# Altium PCB usbasp.PcbDoc
Units mm, origin at the board's own origin, x right, y up, seen from the top; angles counter-clockwise.
Board outline 44.2 x 21.34 mm, 2 copper layers (Top Layer, Bottom Layer); 21 components, 19 nets, 85 pads, 32 vias.
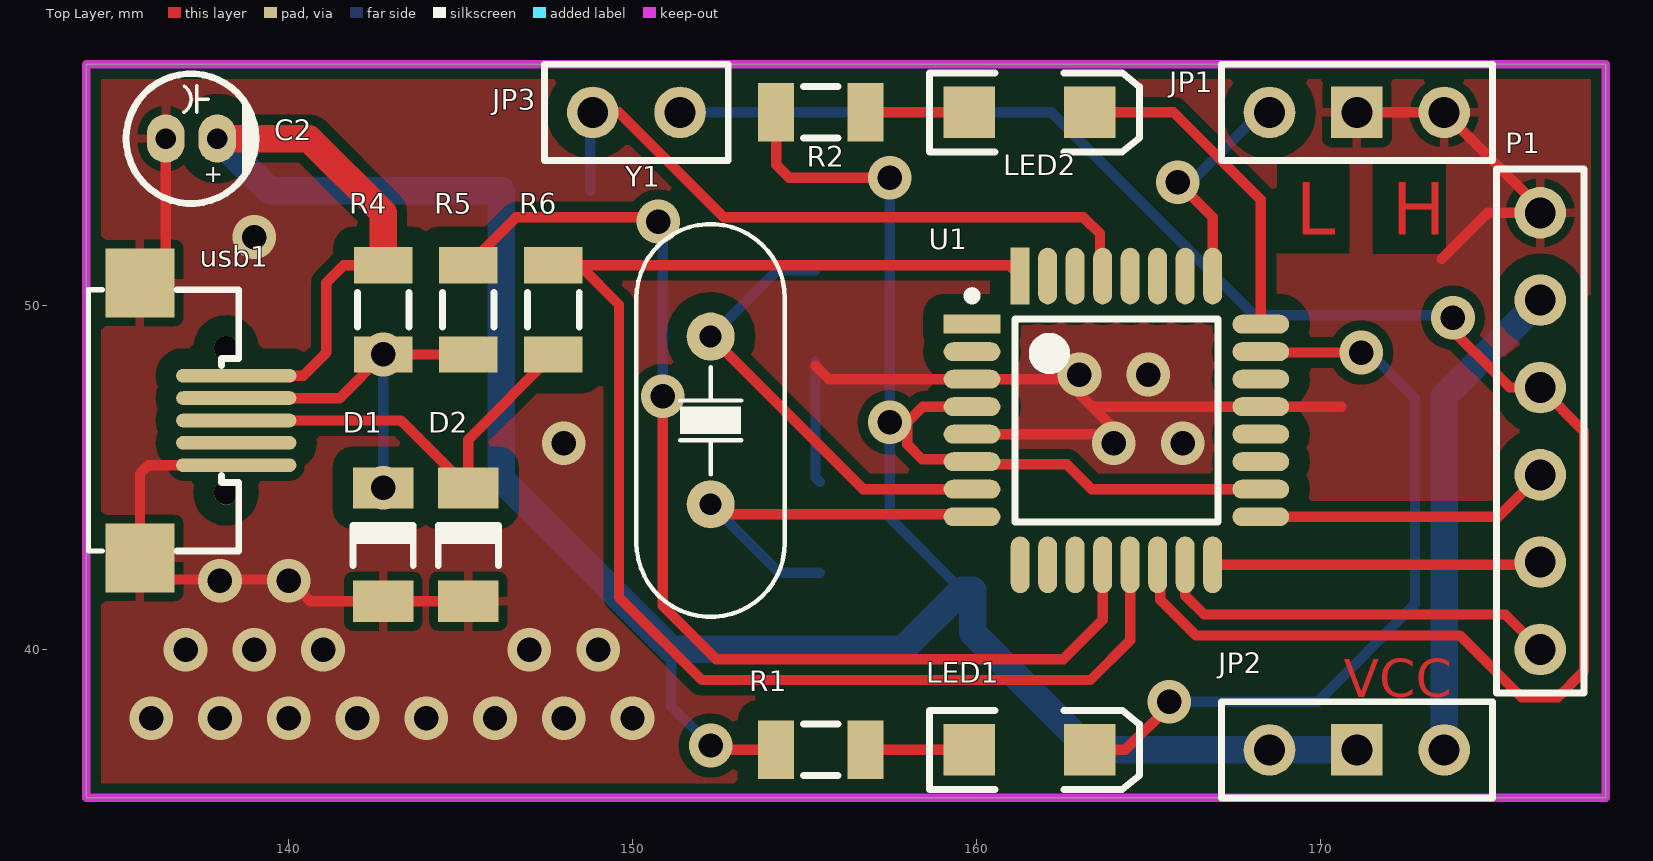
[diagram p0: Top Layer view]
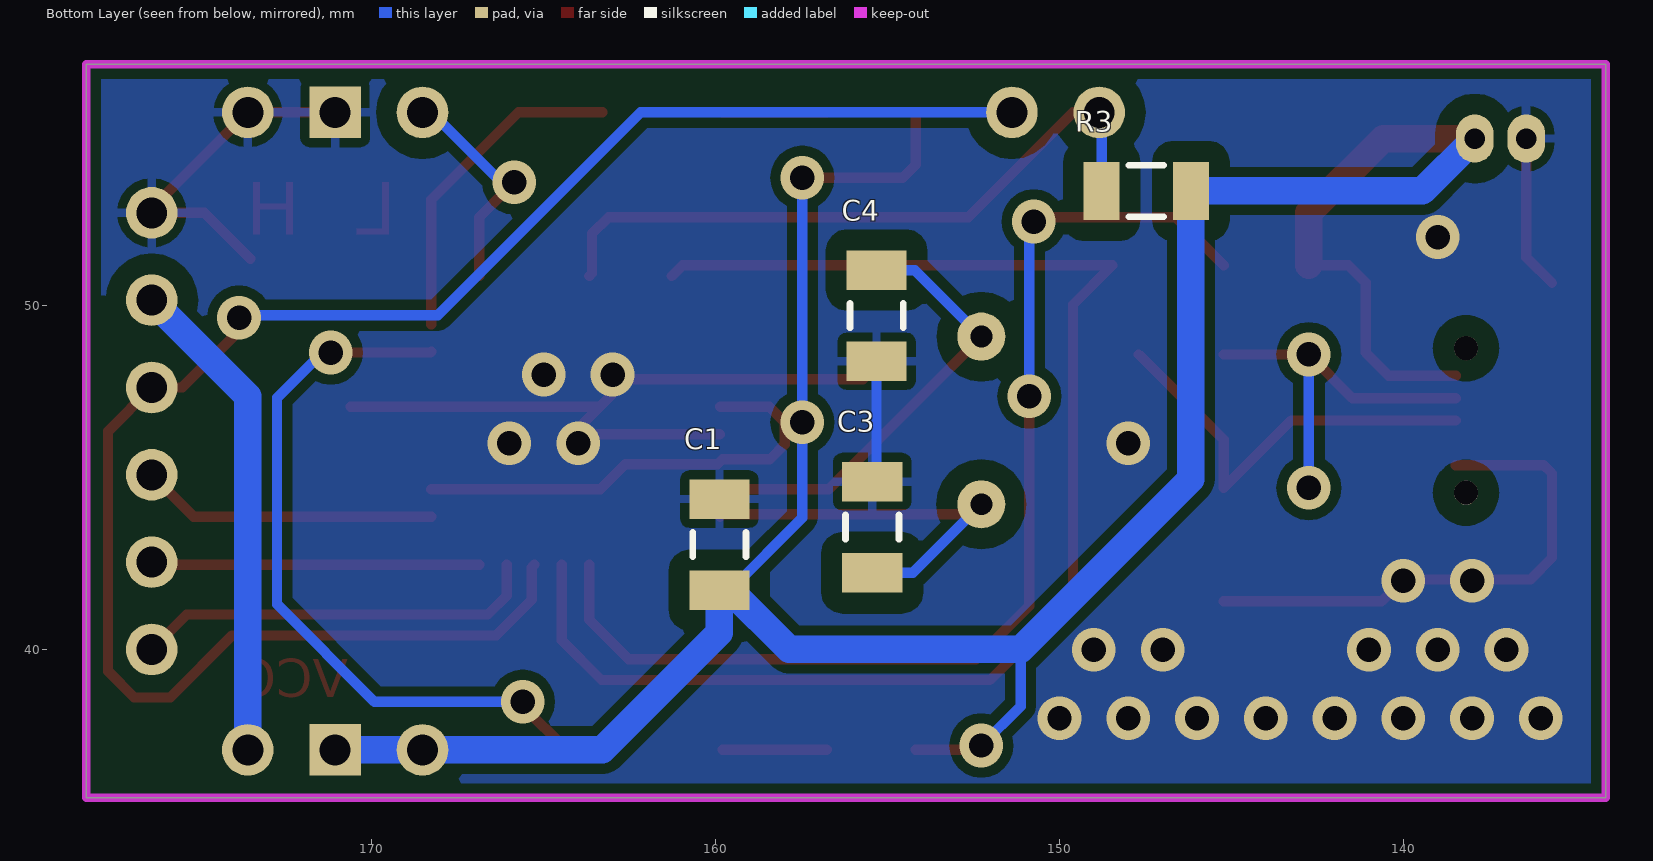
[diagram p1: Bottom Layer view, seen from below]
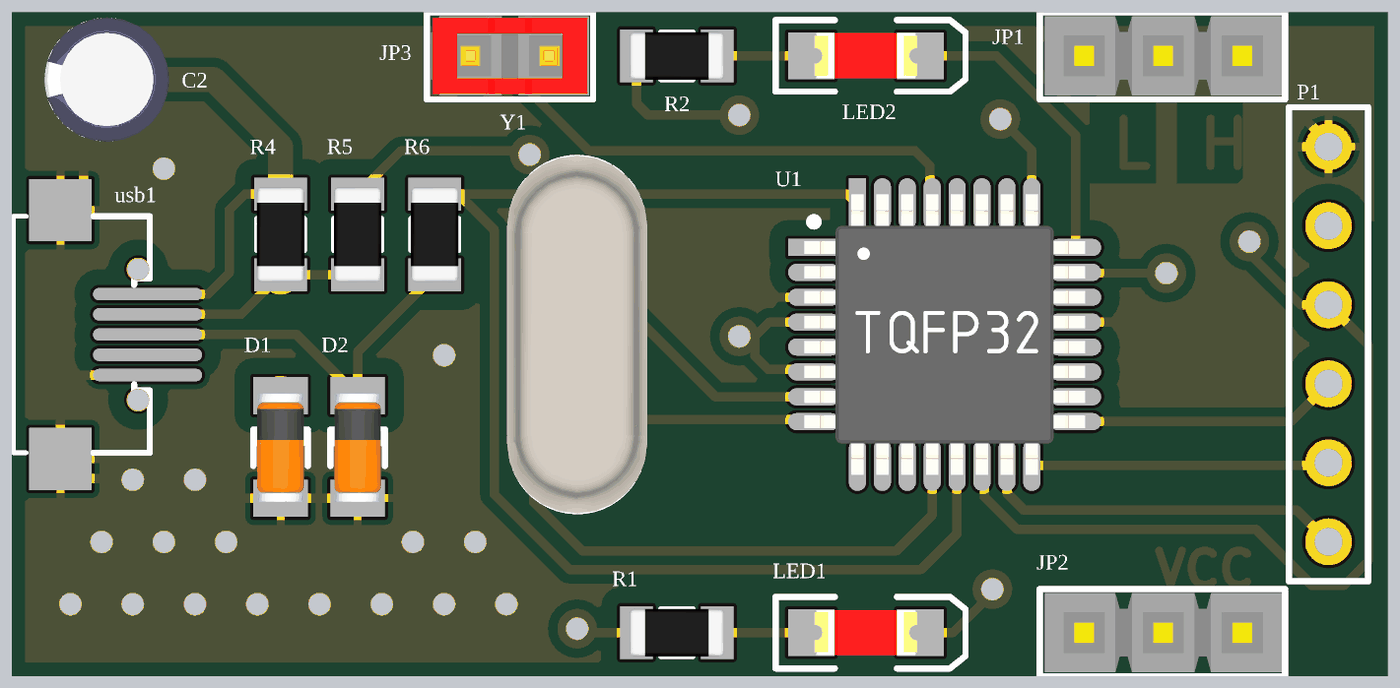
[diagram p2: 3D render of the assembled board from above, using the file's embedded part models]
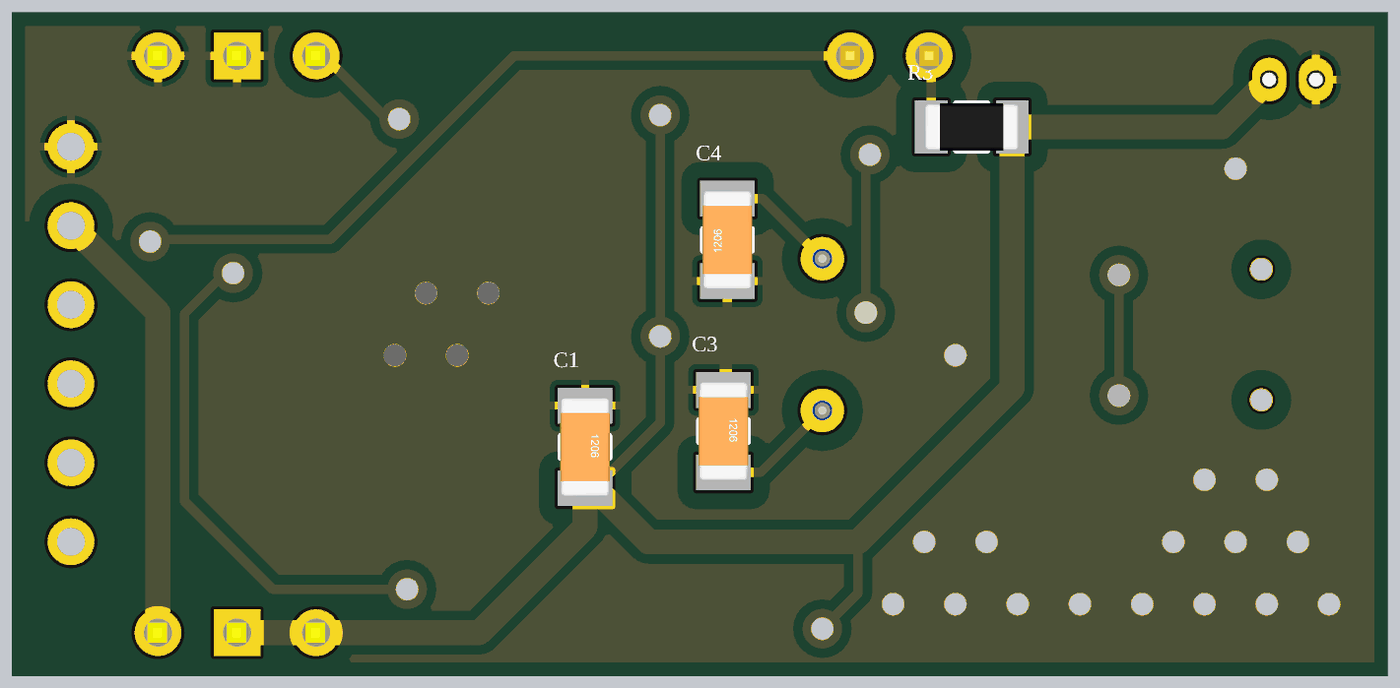
[diagram p3: 3D render of the assembled board from below, using the file's embedded part models]

## Layer stack, top to bottom
Top Solder: solder mask 0.0102, Solder Resist, Dk 3.5
Top Layer: signal copper 0.0356
Dielectric 1: dielectric 0.32, FR-4, Dk 4.8
Bottom Layer: signal copper 0.0356
Bottom Solder: solder mask 0.0102, Solder Resist, Dk 3.5

## Board outline
134.112,35.687 178.308,35.687 178.308,57.023 134.112,57.023

## Design rules (kind name [scope] priority, off if disabled: settings)
Clearance [All] p1: gap=0.3 ignorepadtopadclearanceinfootprint=TRUE except(0: Arc-Hole Track-Hole SMDPad-Hole THPad-Hole Via-Hole Fill-Hole Poly-Hole Region-Hole Text-Hole; 0.6: SMDPad-Fill SMDPad-Poly SMDPad-Region THPad-Fill THPad-Poly THPad-Region)
PolygonConnect [All] p1: connectstyle=Relief reliefconductorwidth=0.254 reliefentries=4 polygonreliefangle="90 Angle" airgapwidth=0.254
RoomDefinition usbasp [InComponentClass('usbasp')] p1 off: confinementstyle=ConfineIn formatcopy=TRUE lockcomponents=FALSE outline 183.896,35.941 233.68,35.941 233.68,56.769 183.896,56.769
RoutingVias [All] p1: holewidth=0.711 width=1.27 viastyle="Through Hole" minholewidth=0.711 minwidth=1.27 maxholewidth=0.711 maxwidth=1.27
SolderMaskExpansion [All] p1: expansion=0.102
UnRoutedNet [All] p1: checkbadconnections=TRUE
Width [All] p1: maxlimit=0.8 minlimit=0.254 preferedwidth=0.3
29 further rules are at their usual default settings.

## Components (designator, comment, footprint, x,y, rotation, side; value= is the part's Value field where it differs from the comment)
C1 "Cap" "Cap 1206 (3216X15L)" 159.893,43.053 r270 bottom value=100nF
C2 "Cap" "Cap - 1.5mm" 137.922,54.864 r180 top value=10u
C3 "Cap" "Cap 1206 (3216X15L)" 155.448,43.561 r270 bottom value=22pF
C4 "Cap" "Cap 1206 (3216X15L)" 155.321,49.712 r90 bottom value=22pF
D1 "Diode Zener" "Diode 1n4148 SMD" 142.748,41.404 r90 top
D2 "Diode Zener" "Diode 1n4148 SMD" 145.224,41.404 r90 top
JP1 "Slow clk" "jumper selector" 168.529,55.626 r0 top
JP2 "VCC OUT" "jumper selector" 168.529,37.084 r0 top
JP3 "Jumper 2Pin" "Jumper Small - 2.54 - Black" 150.114,55.626 r0 top
LED1 "Green" "LED 1206" 161.544,37.084 r0 top
LED2 "Red" "LED 1206" 161.544,55.626 r0 top
P1 "Header 6" HDR1X6 176.403,40.005 r90 top
R1 "Res1" "RES 1206 (3216X08L)" 156.774,37.084 r180 top value=1K
R2 "Res1" "RES 1206 (3216X08L)" 156.774,55.626 r180 top value=1K
R3 "Res1" "RES 1206 (3216X08L)" 148.773,53.34 r180 bottom value=10K
R4 "Res1" "RES 1206 (3216X08L)" 142.748,48.585 r90 top value=2.2K
R5 "Res1" "RES 1206 (3216X08L)" 145.224,51.181 r270 top value=68
R6 "Res1" "RES 1206 (3216X08L)" 147.701,51.181 r270 top value=68
U1 "ATmega8A-AU" TQFP32_N 164.075,46.666 r0 top
usb1 "USB Connector" USB_AB_BM_SHS 137.076,46.666 r90 top
Y1 "12MHz" "CRYSTAL Small" 152.273,46.666 r270 top

## Footprints (in the part's own frame and the unit in brackets; to place one, negate y for a bottom-side part, rotate by r counter-clockwise, add the part's x,y. Pads: shape width x height; smd on the part's side, far side on the other; paste and mask are expansions set on the pad)
"Cap 1206 (3216X15L)" [mm] "Chip Capacitor, 2-Leads, Body 3.2x1.6mm, IPC High Density"
  rect 1.15x1.75 smd: 1(-1.325,0) 2(1.325,0)
  silkscreen extent -0.35,-0.77 0.35,0.77, body extent -1.6,-0.8 1.6,0.8, height 1
"Cap - 1.5mm" [mm] "cap1.5mm"
  oval 1.1x1.4 hole 0.6: 1(0,0) 2(1.5,0)
  silkscreen extent -1.13,-1.88 2.65,1.88, body extent -1.25,-2 2.75,2, height 8.5
"CRYSTAL Small" [mil] "DESIGNER ABBAS BASEREH"
  round 55 hole 25: 1(-96.06,0) 2(96.06,0)
  silkscreen extent -225,-85 225,85, body extent -226,-89 226,89, height 142
"Diode 1n4148 SMD" [mm] "Mini MELF SOD-80"
  rect 1.2x1.75 smd: 1(0,0) 2(3.3,0)
  silkscreen extent 1.04,-0.88 2.22,0.87, body extent -0.13,-0.75 3.37,0.75, height 1.55
HDR1X6 [mm] "Connector; Header; 6 Position"
  round 1.5 hole 0.9: 1(0,0) 2(2.54,0) 3(5.08,0) 4(7.62,0) 5(10.16,0) 6(12.7,0)
  silkscreen extent -1.27,-1.27 13.97,1.27
"jumper selector" [mm]
  round 1.5 hole 0.9: 1(0,0) 3(5.08,0)
  rect 1.5x1.5 hole 0.9: 2(2.54,0)
  silkscreen extent -1.4,-1.4 6.48,1.4, body extent -1.24,-1.27 6.38,1.27, height 10.16
"Jumper Small - 2.54 - Black" [mm] "Designer Abbas Basereh"
  round 1.5 hole 0.9: 1(-1.27,0) 2(1.27,0)
  silkscreen extent -2.67,-1.4 2.67,1.4, body extent -2.54,-1.27 2.54,1.27, height 8.57
"LED 1206" [mm]
  rect 1.5x1.5 smd: 1(-1.75,0) 2(1.75,0)
  silkscreen extent -2.9,-1.15 3.2,1.15, body extent -1.65,-0.72 1.65,0.73, height 1.36
"RES 1206 (3216X08L)" [mm] "Chip Resistor, 2-Leads, Body 3.2x1.6mm, IPC High Density _ (0.125 W)"
  rect 1.05x1.7 smd: 1(0,0) 2(2.596,0)
  silkscreen extent 0.8,-0.75 1.8,0.75, body extent -0.23,-0.76 2.82,0.76, height 0.6
TQFP32_N [mm] "Thin QFP, 32-Leads, Body 7x7mm, Pitch 0.8mm, IPC Medium Density"
  rect 1.65x0.55 smd: 1(-4.2,2.8)
  oval 1.65x0.55 smd: 2(-4.2,2) 3(-4.2,1.2) 4(-4.2,0.4) 5(-4.2,-0.4) 6(-4.2,-1.2) 7(-4.2,-2) 8(-4.2,-2.8) 17(4.2,-2.8) 18(4.2,-2) 19(4.2,-1.2) 20(4.2,-0.4) 21(4.2,0.4) 22(4.2,1.2) 23(4.2,2) 24(4.2,2.8)
  oval 0.55x1.65 smd: 9(-2.8,-4.2) 10(-2,-4.2) 11(-1.2,-4.2) 12(-0.4,-4.2) 13(0.4,-4.2) 14(1.2,-4.2) 15(2,-4.2) 16(2.8,-4.2) 25(2.8,4.2) 26(2,4.2) 27(1.2,4.2) 28(0.4,4.2) 29(-0.4,4.2) 30(-1.2,4.2) 31(-2,4.2)
  rect 0.55x1.65 smd: 32(-2.8,4.2)
  silkscreen extent -4.32,-2.95 2.95,3.75, body extent -4.51,-4.51 4.51,4.51, height 1.1
USB_AB_BM_SHS [mm] "USB Micro AB - Standard (Bottom mount), Shell SMT DESIGNER ABBAS BASEREH"
  oval 0.4x3.5 smd: 1(1.3,-1.4) 2(0.65,-1.4) 3(0,-1.4) 4(-0.65,-1.4) 5(-1.3,-1.4)
  rect 2x2 smd: 5(-4,1.4) 5(4,1.4)
  round 0.7 hole 0.7: H(-2.1,-1.1) H(2.1,-1.1)
  silkscreen extent -3.8,-1.47 3.8,2.9, body extent -4,-1.78 4,4.26, height 2.75

## Part data
C1 C3 C4: library part "Cap ceramic", "CAP-100Nf"
C2: library part "Cap Pol", "CAP-3300Uf"
D1 D2: "Zener Diode", Voltage="3.6 V", Company=E.P.I.L, Design Date=2011/11/02, Designer="Saeid Jorablo"
JP1 JP2: library part "Jumper Selector", "Jumper Selector"
JP3: "Jumper, 2-Pin", Data=16-12-2016, Designer="Abbas Basereh"
LED1 LED2: library part LED0, "Typical INFRARED GaAs LED", LatestRevisionDate=08-Jul-2005, LatestRevisionNote="Mech Layer 1 removed.", PackageDescription="LED; 2 Leads", PackageReference=LED-0, Published=8-Jun-2000, Publisher="Altium Limited"
P1: "Header, 6-Pin", LatestRevisionDate=17-Jul-2002, LatestRevisionNote="Re-released for DXP Platform.", Publisher="Altium Limited"
R1 R2 R3 R4 R5 R6: "Resistor", LatestRevisionDate=17-Jul-2002, LatestRevisionNote="Re-released for DXP Platform.", PackageDescription="Axial Device, Thru-Hole; 2 Leads; 0.3 in Pin Spacing", PackageReference=AXIAL-0.3, Published=8-Jun-2000, Publisher="Altium Limited"
U1: "8-bit AVR Microcontroller, 8KB Flash, 512 Bytes EEPROM, 1KB SRAM, 32-pin TQFP, Industrial Grade (-40°C to 85°C)", Supplier Part Number 1=ATMEGA8A-AU-ND, Code_JEDEC=MS-026-ABA, ComponentLink1Description="Manufacturer Link", ComponentLink1URL=http://www.atmel.com/products/avr/default.asp?, ComponentLink2Description="ATmega8A Datasheet", ComponentLink2URL=http://www.atmel.com/dyn/resources/prod_documents/doc8159.pdf, ComponentLink3Description="ATmega8A Summary", ComponentLink3URL=http://www.atmel.com/dyn/resources/prod_documents/8159S.pdf, ComponentLink4Description="Atmel.com Home", ComponentLink4URL=http://www.atmel.com, DatasheetVersion="revC, Jul-2009", PackageDescription="32-Lead, 7x7x1.0 mm Body, 0.8mm Lead Pitch, Thin Profile Plastic Quad Flat Package (TQFP)", PackageReference=32A, PackageVersion="revB, Oct-2001", Published=1-Apr-2010, Publisher="Altium Limited", Supplier 1=Digi-Key, Supplier 2=Farnell, Supplier 3=Mouser, Supplier Part Number 2=1748532, Supplier Part Number 3=556-ATMEGA8A-AU
usb1: library part "USB MICRO", "USB Connector MICRO-B Type", Max Current=1600mA, Category=Connector, ComponentLink1Description=Datasheet, ComponentLink2Description=Reference, Designer="ABBAS BASEREH", Mounting Technology="Surface Mount\Through-Hole", Pin Count=5-7, Publisher="ABBAS BASEREH", Status=Unreleased, Update=1395-11-17
Y1: library part CRYSTAL, "Crystal"

## Via types
v1: diameter 1.27, hole 0.711, Top Layer to Bottom Layer, tented both sides, 32 vias

## Nets (pads, with @x,y where several pads share a name; then routed paths per layer and width w, separated by ;. In a path a pad name is that pad's centre, name@x,y a point inside that pad or via, vN(x,y) a via of type N, cw(c..) or ccw(c..) an arc to the next point about the centre after c; other vN are vias at no path point)
GND: C1.1 C2.2 C3.1 C4.1 D1.1 D2.1 JP1.2 JP1.3 P1.6 U1.3 U1.5 U1.21 usb1.5 | length 54.9
  Top Layer w0.3: usb1.5@135.676,50.666 136.422,51.412 C2.2 ; usb1.5@138.476,45.366 135.917,45.366 135.676,45.125 135.676,42.666 136.305,42.037 140,42.037 140.633,41.404 D1.1 D2.1 ; 155.321,48.26 155.715,47.866 U1.3 162.573,47.866 163.373,47.066 ; U1.5 164.173,46.266 163.373,47.066 ; 170.612,47.066 U1.21 163.373,47.066 ; JP1.2 JP1.3 176.403,52.832 P1.6 174.879,52.705 173.805,51.631 ; 173.541,51.366 173.805,51.63
  Bottom Layer w0.3: C4.1 155.321,45.013 C3.1
  Bottom Layer w0.5: JP1.2@170.88,55.626 JP1.2
  other v1: 136,38 138,38 140,38 142,38 144,38 146,38 148,38 150,38 137,40 139,40 141,40 147,40 149,40 138,42 140,42 148,46 164,46 166,46 163,48 165,48 139,52
MISO: P1.2 U1.16 | length 9.6
  Top Layer w0.3: U1.16 176.324,42.466 P1.2
MOSI: P1.1 U1.15 | length 11.9
  Top Layer w0.3: U1.15 166.075,41.57 166.624,41.021 175.387,41.021 P1.1
NetC3_2: C3.2 U1.8 Y1.2 | length 11.8
  Top Layer w0.3: Y1.2 152.558,43.941 159.8,43.941 U1.8
  Bottom Layer w0.3: Y1.2 154.263,42.236 C3.2
NetC4_2: C4.2 U1.7 Y1.1 | length 13.3
  Top Layer w0.3: Y1.1 156.713,44.666 U1.7
  Bottom Layer w0.3: Y1.1 154.204,51.037 C4.2
NetD1_2: D1.2 R4.1 R5.2 usb1.2 | length 11.2
  Top Layer w0.3: usb1.2 141.479,47.316 v1(142.748,48.585) R5.2
  Bottom Layer w0.3: v1(142.748,44.704) v1(142.748,48.585)
NetD2_2: D2.2 R6.2 usb1.3 | length 12.5
  Top Layer w0.3: usb1.3 143.262,46.666 D2.2 145.224,46.109 R6.2
NetJP1_1: JP1.1 U1.25 | length 6.7
  Top Layer w0.3: v1(165.862,53.594) 166.875,52.581 U1.25
  Bottom Layer w0.3: v1(165.862,53.594) 166.243,53.594 168.275,55.626 JP1.1
NetJP2_3: JP2.3 P1.5 | length 14.2
  Bottom Layer w0.8: JP2.3 173.609,47.371 P1.5
NetLED1_1: LED1.1 R1.1 | length 3
  Top Layer w0.3: R1.1 LED1.1
NetLED1_2: LED1.2 U1.23 | length 22.3
  Top Layer w0.3: LED1.2 164.338,37.084 165.608,38.354 v1(165.608,38.481) ; U1.23 168.3,48.641 v1(171.196,48.641)
  Bottom Layer w0.3: v1(165.608,38.481) 169.926,38.481 172.759,41.314 172.759,47.332 171.45,48.641 v1(171.196,48.641)
NetLED2_1: LED2.1 R2.1 | length 3
  Top Layer w0.3: R2.1 LED2.1
NetLED2_2: LED2.2 U1.24 | length 9.7
  Top Layer w0.3: LED2.2 165.735,55.626 168.275,53.086 U1.24
NetR5_1: R5.1 U1.12 | length 33.9
  Top Layer w0.3: R5.1 146.621,52.578 150.876,52.578 v1(150.749,52.451) ; v1(150.876,47.371) 150.876,41.275 152.435,39.716 162.525,39.716 163.675,40.866 U1.12
  Bottom Layer w0.3: v1(150.876,47.371) 150.876,52.07 151.003,52.197 v1(150.749,52.451) ; v1(150.749,52.451) 150.749,52.705 150.622,52.578 v1(150.749,52.451)
NetR6_1: R6.1 U1.13 U1.32 | length 41.6
  Top Layer w0.3: U1.32 160.96,51.181 148.463,51.181 149.606,50.038 149.606,41.529 152.019,39.116 163.322,39.116 164.475,40.269 U1.13
reset: JP3.1 R3.1 U1.29 | length 19.9
  Top Layer w0.3: JP3.1 149.606,55.626 152.654,52.578 163.114,52.578 163.6,52.092 163.6,50.941 U1.29
  Bottom Layer w0.3: R3.1 148.773,55.697 JP3.1
SCK: P1.3 U1.17 | length 8.6
  Top Layer w0.3: U1.17 175.184,43.866 P1.3
SS: JP3.2 P1.4 U1.14 | length 52.7
  Top Layer w0.3: U1.14 165.35,42.391 165.35,41.446 166.385,40.412 174.061,40.412 175.864,38.608 176.911,38.608 177.673,39.37 177.673,46.355 P1.4 175.514,47.625 173.482,49.657 v1(173.863,49.657)
  Bottom Layer w0.3: JP3.2 162.179,55.626 168.079,49.726 173.794,49.726 v1(173.863,49.657)
VCC: C1.2 C2.1 JP2.1 JP2.2 R1.2 R2.2 R3.2 R4.2 U1.4 U1.6 U1.18 usb1.1 | length 98.7
  Top Layer w0.3: usb1.1 140.422,47.966 141.097,48.641 141.097,50.673 141.605,51.181 R4.2 ; v1(152.273,37.211) 152.4,37.084 R1.2 ; R2.2 154.178,54.102 154.559,53.721 v1(157.48,53.721) ; v1(157.48,46.609) v1@157.988,46.609 ; U1.4 158.445,47.066 v1@157.988,46.609 ; U1.18 163.36,44.666 162.635,45.391 159.95,45.391 U1.6 159.8,45.541 158.421,45.541 157.988,45.974 v1@157.988,46.609
  Top Layer w0.8: C2.1 140.589,54.864 142.748,52.705 R4.2
  Bottom Layer w0.3: 151.13,40.005 151.13,38.354 v1(152.273,37.211) ; v1(157.48,53.721) v1(157.48,46.609) 157.48,43.832 C1.2@159.584,41.728
  Bottom Layer w0.8: C2.1 139.446,53.34 R3.2 146.177,44.958 151.13,40.005 157.861,40.005 159.584,41.728 C1.2 159.893,40.485 163.294,37.084 JP2.1 JP2.2
pads on no net: U1.1 U1.2 U1.9 U1.10 U1.11 U1.19 U1.20 U1.22 U1.26 U1.27 U1.28 U1.30 U1.31 usb1.4 usb1.H

## Polygon pours and split planes (outlines as drawn)
GND on Bottom Layer "GND_bottom" (solid, remove dead copper, pour order 0): 134.18,57.083 178.376,57.083 178.376,35.747 134.18,35.747
GND on Top Layer "GND_top" (solid, remove dead copper, pour order 2): 134.026,57.023 178.222,57.023 178.222,35.687 134.026,35.687

## Keep-outs
Keep-Out Layer:
  the board outline again, w0.25

## Other copper
Top Layer:
  text "L" at 169.291,52.07 h1.52
  text "H" at 172.085,52.07 h1.52
  text "VCC" at 170.688,38.608 h1.1

## Text inside footprints (layer, text, board x,y; h text height)
C2: Top Overlay "+" at 138.092,54.024 h0.5 r180
usb1: Mechanical 1 "PCB EDGE" at 133.928,44.253 h0.7 r90